# Altium PCB level_shift.PcbDoc
Units mil, origin at the board's own origin, x right, y up, seen from the top; angles counter-clockwise.
Board outline 5680 x 750 mil, 2 copper layers (Top Layer, Bottom Layer); 10 components, 20 nets, 82 pads, 10 vias.
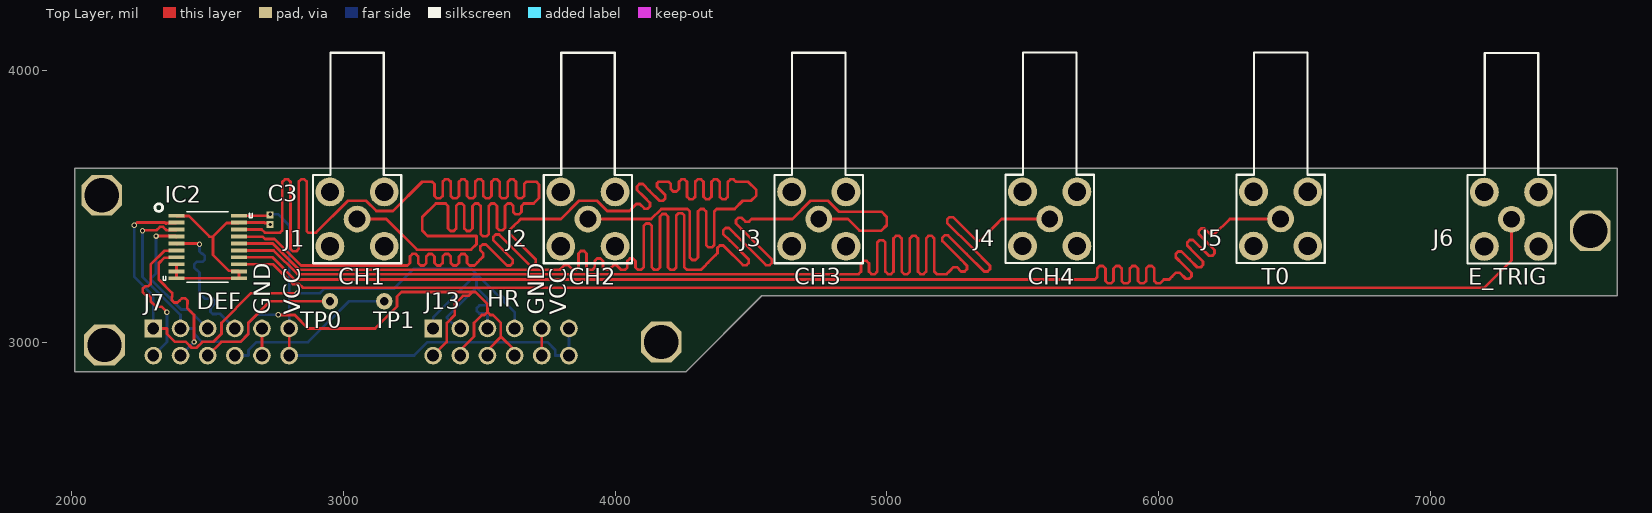
[diagram p0: Top Layer view]
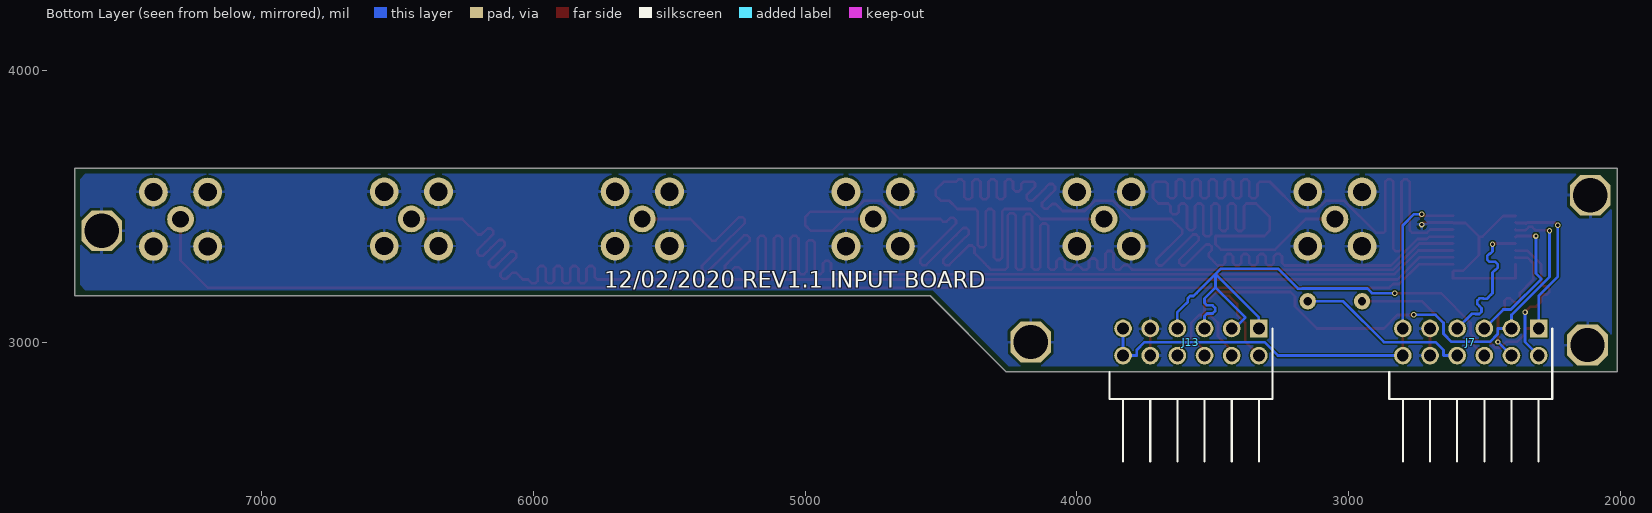
[diagram p1: Bottom Layer view, seen from below]

## Layer stack, top to bottom
Top Solder: solder mask 0.4, Solder Resist, Dk 3.5
Top Layer: signal copper 1.4
Dielectric 1: dielectric 12.6, FR-4, Dk 4.8
Bottom Layer: signal copper 1.4
Bottom Solder: solder mask 0.4, Solder Resist, Dk 3.5

## Board outline
2010,2890 2010,3640 7690,3640 7690,3170 4540,3170 4260,2890

## Design rules (kind name [scope] priority, off if disabled: settings)
BoardOutlineClearance [All] p1: gap=16 ignorepadtopadclearanceinfootprint=FALSE except(0: Arc-SplitContinuation Track-SplitContinuation SMDPad-SplitContinuation THPad-SplitContinuation Via-SplitContinuation Fill-SplitContinuation Poly-SplitContinuation Region-SplitContinuation Text-SplitContinuation)
Clearance [All] p1: gap=6 ignorepadtopadclearanceinfootprint=FALSE except(0: Arc-Hole Track-Hole SMDPad-Hole THPad-Hole Via-Hole Fill-Hole Poly-Hole Region-Hole Text-Hole; 12: Arc-SMDPad Arc-THPad Track-SMDPad Track-THPad SMDPad-SMDPad SMDPad-THPad THPad-THPad)
HoleSize [All] p1: absolutevalues=TRUE maxlimit=245 minlimit=12 maxpercent=80.000 minpercent=20.000
MatchedLengths HR_MATCH [InxSignalClass('IC2->HRPMOD')] p1: tolerance=10 checknetsindiffpair=FALSE checkdiffpairvsdiffpair=TRUE checkxsignals=TRUE checkothers=TRUE
MatchedLengths HR_MATCH1 [InxSignalClass('IC2->HRPMOD1')] p2: tolerance=10 checknetsindiffpair=FALSE checkdiffpairvsdiffpair=TRUE checkxsignals=TRUE checkothers=TRUE
MatchedLengths IC2->SMA [InxSignalClass('IC2->SMA')] p3: tolerance=50 checknetsindiffpair=FALSE checkdiffpairvsdiffpair=TRUE checkxsignals=TRUE checkothers=TRUE
MatchedLengths PMOD->IC2 [InxSignalClass('PMOD->IC2')] p4: tolerance=50 checknetsindiffpair=FALSE checkdiffpairvsdiffpair=TRUE checkxsignals=TRUE checkothers=TRUE
PolygonConnect [All] p1: connectstyle=Relief reliefconductorwidth=10 reliefentries=4 polygonreliefangle="90 Angle" airgapwidth=10
RoutingVias [All] p1: holewidth=245 width=490 viastyle="Through Hole" minholewidth=6 minwidth=12 maxholewidth=23.62 maxwidth=47.24
SignalStimulus IN1 [InNet('NetIC2_13')] p1: kind=2 level=0 starttime=10.00n stoptime=20.00n periodtime=50.00n
SignalStimulus IN6 [InNet('NetIC2_18')] p2: kind=2 level=0 starttime=10.00n stoptime=20.00n periodtime=50.00n
SignalStimulus IN5 [InNet('NetIC2_17')] p3: kind=2 level=0 starttime=10.00n stoptime=20.00n periodtime=50.00n
SignalStimulus IN4 [InNet('NetIC2_16')] p4: kind=2 level=0 starttime=10.00n stoptime=20.00n periodtime=50.00n
SignalStimulus IN3 [InNet('NetIC2_15')] p5: kind=2 level=0 starttime=10.00n stoptime=20.00n periodtime=50.00n
SignalStimulus IN2 [InNet('NetIC2_14')] p6: kind=2 level=0 starttime=10.00n stoptime=20.00n periodtime=50.00n
SolderMaskExpansion [All] p1: expansion=4
SupplyNets GND [InNet('GND')] p1: voltage=0.000
SupplyNets 3v3 [InNet('VCC')] p2: voltage=3.300
Width [All] p1: maxlimit=78.74 minlimit=6 preferedwidth=10 minimp=50.000000 maximp=50.000000 favimp=50.000000
29 further rules are at their usual default settings.

## Components (designator, comment, footprint, x,y, rotation, side; value= is the part's Value field where it differs from the comment)
C3 "100nF" CAPC1005X56N 2730,3450 r90 top
IC2 "SN74LV245APW" SOP65P640X120-20N 2500,3350 r0 top
J1 "CH0" 142-0701-501 3050,3290 r270 top
J2 "CH1" 142-0701-501 3900,3290 r270 top
J3 "CH2" 142-0701-501 4750,3290 r270 top
J4 "CH3" 142-0701-501 5600,3290.4 r270 top
J5 "T0" 142-0701-501 6450,3290.4 r270 top
J6 "E_TRIG" 142-0701-501 7300,3289.4 r270 top
J7 "INPUTS" HDRRA12W64P254_2X6_1524X254X610P 2300,3050 r0 bottom
J13 "HR_INPUTS" HDRRA12W64P254_2X6_1524X254X610P 3330,3050 r0 bottom

## Footprints (in the part's own frame and the unit in brackets; to place one, negate y for a bottom-side part, rotate by r counter-clockwise, add the part's x,y. Pads: shape width x height; smd on the part's side, far side on the other; paste and mask are expansions set on the pad)
142-0701-501 [mm]
  round 2.5 hole 1.57: 1(-4.13,0)
  round 2.7 hole 1.7: 2(-6.67,2.54) 3(-1.59,2.54) 4(-6.67,-2.54) 5(-1.59,-2.54)
  silkscreen extent -19.69,-4.13 0,4.13
CAPC1005X56N [mm]
  rect 0.65x0.64 smd: 1(-0.45,0) 2(0.45,0)
  body extent -0.5,-0.25 0.5,0.25, height 0.56
HDRRA12W64P254_2X6_1524X254X610P [mm]
  rect 1.65x1.65 hole 1.1: 1(0,0)
  round 1.65 hole 1.1: 2(0,2.54) 3(2.54,0) 4(2.54,2.54) 5(5.08,0) 6(5.08,2.54) 7(7.62,0) 8(7.62,2.54) 9(10.16,0) 10(10.16,2.54) 11(12.7,0) 12(12.7,2.54)
  silkscreen extent -1.27,0 13.97,12.44, body extent -1.27,-0.32 13.97,12.44, height 6.1
SOP65P640X120-20N [mil]
  rect 58x14 smd: 1(-115,115) 2(-115,90) 3(-115,64) 4(-115,38) 5(-115,13) 6(-115,-13) 7(-115,-38) 8(-115,-64) 9(-115,-90) 10(-115,-115) 11(115,-115) 12(115,-90) 13(115,-64) 14(115,-38) 15(115,-13) 16(115,13) 17(115,38) 18(115,64) 19(115,90) 20(115,115)
  silkscreen extent -164,-130 164,130

## Part data
C3: library part 0402YC104MAT2A, "Capacitor", Manufacturer_Name=AVX, Mouser Part Number=581-0402YC104MAT2A, Datasheet Link=http://www.mouser.com/catalog/supplier/library/pdf/AVXSurfaceMountCeramic.pdf, Height=0.56mm, Manufacturer_Part_Number=0402YC104MAT2A, Mouser Price/Stock=https://www.mouser.com/Search/Refine.aspx?Keyword=581-0402YC104MAT2A
IC2: "Integrated Circuit", Manufacturer_Name="Texas Instruments", Mouser Part Number=595-SN74LV245APW, RS Part Number=4394371, Datasheet Link=http://www.ti.com/lit/gpn/SN74LV245A, Manufacturer_Part_Number=SN74LV245APW, Mouser Price/Stock=https://www.mouser.com/Search/Refine.aspx?Keyword=595-SN74LV245APW, RS Price/Stock=https://uk.rs-online.com/web/p/products/4394371
J1 J2 J3 J4 J5 J6: library part 142-0701-501, "Connector", Manufacturer_Name=Cinch, RS Part Number=8859850, Datasheet Link=http://uk.rs-online.com/web/p/products/8859850, Manufacturer_Part_Number=142-0701-501, RS Price/Stock=http://uk.rs-online.com/web/p/products/8859850
J7 J13: library part TSW-106-08-L-D-RA, "Connector", Manufacturer_Name=SAMTEC, Mouser Part Number=200-TSW10608LDRA, RS Part Number=7670934P, Datasheet Link=http://suddendocs.samtec.com/catalog_english/tsw_th.pdf, Height=6.1mm, Manufacturer_Part_Number=TSW-106-08-L-D-RA, Mouser Price/Stock=https://www.mouser.com/Search/Refine.aspx?Keyword=200-TSW10608LDRA, RS Price/Stock=http://uk.rs-online.com/web/p/products/7670934P

## Free pads (board coordinates)
  round 60 hole 30: 2(2950,3150) 3(3150,3150)
  oct 150x150 hole 126: 4(2110,3540) 4(2120,2988.81) 4(4170,3000) 4(7590,3410)

## Via types
v1: diameter 20, hole 12, Top Layer to Bottom Layer, 10 vias

## Nets (pads, with @x,y where several pads share a name; then routed paths per layer and width w, separated by ;. In a path a pad name is that pad's centre, name@x,y a point inside that pad or via, vN(x,y) a via of type N, cw(c..) or ccw(c..) an arc to the next point about the centre after c; other vN are vias at no path point)
GND: C3.1 IC2.1 IC2.8 IC2.9 IC2.10 IC2.11 IC2.12 IC2.19 J1.2 J1.3 J1.4 J1.5 J2.2 J2.3 J2.4 J2.5 J3.2 J3.3 J3.4 J3.5 J4.2 J4.3 J4.4 J4.5 J5.2 J5.3 J5.4 J5.5 J6.2 J6.3 J6.4 J6.5 J7.9 J7.10 J13.9 J13.10 pad.4 | length 1094.9
  Top Layer w10: IC2.8 IC2.9 IC2.10 IC2.11 IC2.12 2613,3262 2578.96,3262 2520,3320.96 2520,3388.07 ; IC2.1 2386,3464 2431,3464 2506.93,3388.07 2520,3388.07 ; J7.10 J7.9 ; v1(2730,3432.28) 2724.36,3437.92 2710.36,3437.92 2708.28,3440 IC2.19 2613,3438 2569.93,3438 2520,3388.07 ; J13.10 J13.9
IL0: IC2.2 J7.1 J13.1 J13.3 J13.5 J13.7 | length 3004.6
  Top Layer w10: v1(2230,3430) 2240,3440 2342.63,3440 2346.79,3435.84 2348.96,3438 IC2.2@2383,3438 ; J7.1@2294,3056 J7.1 2350.52,3050 2350.52,3029.5 2379.5,3000.52 2419.78,3000.52 2441.3,2979 2458.7,2979 2480.22,3000.52 2520.5,3000.52 2550.52,3030.54 2550.52,3070.5 2660.02,3180 v1(2830,3180) ; IC2.2@2383,3438 IC2.2 IC2.2@2383,3438
  Bottom Layer w10: v1(2230,3430) 2230,3240 2300,3170 J7.1 ; v1(2830,3180) 2913.53,3180 2930.53,3197 3170,3197 3170,3196.47 3186.47,3196.47 3260,3270 3470,3270 3490,3250 ; J13.1 3330,3090 3490,3250 ; J13.3 3420,3050 3380,3090 3490,3200 ; J13.5@3520,3050 J13.5 3530,3090 3530,3096 3521,3105 3500.07,3105 3491.07,3114 3491.07,3126 3500.07,3135 3521,3135 3530,3144 3530,3150 3530,3160 3490,3200 ; J13.7 3630,3110 3610,3130 3591.92,3148.08 3591.92,3148.28 3591.92,3161.01 3583.43,3169.49 3570.71,3169.49 3570.51,3169.49 3560,3180 3490,3250 ; 3490,3200 3490,3250
IL1: IC2.3 J7.3 J13.2 J13.4 J13.6 J13.8 | length 2739.2
  Top Layer w10: v1(2260,3410) 2262,3412 2300,3412 2312,3412 2315,3415 2324,3424 2336,3424 2345,3415 2348,3412 2370,3412 2383,3412 IC2.3 ; v1(2760,3100) 2760.52,3099.48 2820.5,3099.48 2870,3049.98 3116.44,3049.98 3197,3130.53 3197,3167 3214,3184 3474,3184 ; J13.2 3380,3000 3380,3060 3380.52,3060.52 3380.52,3070.5 3409.5,3099.48 3410,3099.48 3410,3140 3440,3170 3460,3170 3474,3184 ; J13.4 3430,2970 3480.52,3020.52 3480.52,3070.5 3509.5,3099.48 3519.48,3099.48 3530,3110 ; J13.6 J13.6@3530,2968.96 ; J13.6@3530,2970 J13.6@3530,2968.96 ; J13.8 3630,2970 3580.52,3019.48 ; 3474,3184 3486,3184 3530,3140 3530,3110 ; J13.6@3530,2968.96 3580.52,3019.48 ; 3530,3110 3540.52,3099.48 3550.5,3099.48 3579.48,3070.5 3579.48,3020.52 3580.52,3019.48
  Bottom Layer w10: v1(2260,3410) 2260,3240 2400,3100 J7.3 2450.52,3050 2450.52,3029.5 2479.5,3000.52 2620.5,3000.52 2650.52,3030.54 2650.52,3070.5 2680.02,3100 v1(2760,3100)
IL2: IC2.4 J7.5 | length 528
  Top Layer w10: v1(2310,3390) 2381,3390 2384,3387 IC2.4
  Bottom Layer w10: v1(2310,3390) 2310,3252.63 2290,3232.63 2402.63,3120 2430,3120 J7.5
IL3: IC2.5 J7.7 | length 548.5
  Top Layer w10: IC2.5@2387,3361 IC2.5 2467,3363 v1(2470,3360)
  Bottom Layer w10: v1(2470,3360) 2470,3340 2470,3334 2479,3325 2480.72,3325 2489.72,3316 2489.72,3304 2480.72,3295 2470,3295 2459.28,3295 2450.28,3286 2450.28,3274 2459.28,3265 2461,3265 2470,3256 2470,3210 2470,3190 2470,3180 2475.75,3174.25 2490.6,3159.4 2503.33,3159.4 2504.75,3160.81 2517.47,3160.81 2525.96,3152.33 2525.96,3139.6 2518.18,3131.82 2510.4,3124.04 2510.4,3111.31 2518.89,3102.83 2531.62,3102.83 2533.03,3104.24 2545.76,3104.24 2550,3100 J7.7
IL4: IC2.6 J7.2 | length 546.1
  Top Layer w10: v1(2350,3110) 2330,3130 2310,3130 2290,3150 2290,3160 2290,3166 2281,3175 2269.83,3175 2260.83,3184 2260.83,3196 2269.83,3205 2281,3205 2290,3214 2290,3285.07 2340.93,3336 2384,3336 IC2.6
  Bottom Layer w10: J7.2 2350,3000 v1(2350,3110)
IL5: IC2.7 J7.4 | length 558.3
  Top Layer w10: IC2.7 2385,3310 2339.93,3310 2320,3290.07 2320,3230 2369.39,3180.61 2369.39,3167.88 2367.98,3166.47 2367.98,3153.74 2376.46,3145.25 2389.19,3145.25 2396.97,3153.03 2404.75,3160.81 2417.47,3160.81 2425.96,3152.33 2425.96,3139.6 2424.54,3138.18 2424.54,3125.46 2439.39,3110.61 2450,3100 v1(2450,3000) ; J7.4 J7.4@2400,2970
  Bottom Layer w10: J7.4 v1(2450,3000)
NetIC2_13: IC2.13 J6.1 | length 4914
  Top Layer w10: IC2.13 2741.37,3286 2813.37,3214 2836,3214 2850,3200 7200,3200 7300,3300 J6.1
NetIC2_14: IC2.14 J5.1 | length 4907
  Top Layer w10: IC2.14 2738,3312 2820,3230 5760,3230 5766,3230 5775,3239 5775,3271 5784,3280 5796,3280 5805,3271 5805,3230 5805,3225 5814,3216 5826,3216 5835,3225 5835,3230 5835,3271 5844,3280 5856,3280 5865,3271 5865,3230 5865,3225 5874,3216 5886,3216 5895,3225 5895,3230 5895,3271 5904,3280 5916,3280 5925,3271 5925,3230 5925,3225 5934,3216 5946,3216 5955,3225 5955,3230 5955,3271 5964,3280 5976,3280 5985,3271 5985,3230 5985,3225 5994,3216 6006,3216 6015,3225 6020,3230 6040,3230 6050.61,3240.61 6065.46,3255.46 6078.18,3255.46 6100.81,3232.83 6113.54,3232.83 6122.02,3241.31 6122.02,3254.04 6093.03,3283.03 6064.04,3312.02 6064.04,3324.75 6072.53,3333.24 6085.25,3333.24 6114.25,3304.25 6143.24,3275.25 6155.97,3275.25 6164.45,3283.74 6164.45,3296.47 6135.46,3325.46 6106.47,3354.45 6106.47,3367.18 6114.95,3375.66 6127.68,3375.66 6156.67,3346.67 6185.66,3317.68 6198.39,3317.68 6206.88,3326.17 6206.88,3338.89 6177.89,3367.89 6148.89,3396.88 6148.89,3409.61 6157.38,3418.09 6170.11,3418.09 6192.73,3395.46 6205.46,3395.46 6263,3453 6278,3453 6300,3453 J5.1
NetIC2_15: IC2.15 J4.1 | length 4914
  Top Layer w10: IC2.15 2743,3337 2830,3250 4890,3250 4896,3250 4905,3259 4905,3289.85 4914,3298.85 4926,3298.85 4935,3289.85 4935,3259 4944,3250 4956,3250 4965,3259 4965,3365.8 4974,3374.8 4986,3374.8 4995,3365.8 4995,3259 5004,3250 5016,3250 5025,3259 5025,3381.79 5034,3390.79 5046,3390.79 5055,3381.79 5055,3259 5064,3250 5076,3250 5085,3259 5085,3381.79 5094,3390.79 5106,3390.79 5115,3381.79 5115,3259 5124,3250 5136,3250 5145,3259 5145,3381.79 5154,3390.79 5166,3390.79 5175,3381.79 5175,3259 5184,3250 5205,3250 5220,3250 5230.61,3260.61 5245.46,3275.46 5258.18,3275.46 5274.06,3259.58 5286.79,3259.58 5295.27,3268.06 5295.27,3280.79 5273.03,3303.03 5204.58,3371.49 5204.58,3384.22 5213.06,3392.7 5225.79,3392.7 5294.25,3324.25 5358.91,3259.58 5371.64,3259.58 5380.13,3268.06 5380.13,3280.79 5315.46,3345.46 5222.27,3438.65 5222.27,3451.38 5230.75,3459.87 5243.48,3459.87 5330.31,3373.04 5343.04,3373.04 5400,3430 5423,3453 J4.1
NetIC2_16: IC2.16 J3.1 | length 4914
  Top Layer w10: IC2.16 2739.63,3363 2836.63,3266 3790,3266 3796.14,3266 3805,3274.86 3814,3283.86 3826,3283.86 3835,3274.86 3843.86,3266 3856,3266 3865,3275 3865,3326.22 3874,3335.22 3886,3335.22 3895,3326.22 3895,3275 3904,3266 3916,3266 3925,3275 3925,3298.39 3934,3307.39 3946,3307.39 3955,3298.39 3955,3275 3964,3266 3977.55,3266 3985,3273.45 3994,3282.45 4006,3282.45 4015,3273.45 4022.45,3266 4036,3266 4045,3275 4045,3298.39 4054,3307.39 4066,3307.39 4075,3298.39 4075,3275 4084,3266 4096,3266 4105,3275 4105,3427.6 4114,3436.6 4126,3436.6 4135,3427.6 4135,3275 4144,3266 4156,3266 4165,3275 4165,3462.37 4174,3471.37 4186,3471.37 4195,3462.37 4195,3275 4204,3266 4216,3266 4225,3275 4225,3465 4234,3474 4246,3474 4255,3465 4255,3275 4264,3266 4285,3266 4315,3266 4316,3266 4326.61,3276.61 4342.5,3292.5 4370,3320 4377,3327 4377,3334.21 4377,3346.94 4385.48,3355.43 4398.21,3355.43 4401.82,3351.82 4470.83,3282.81 4483.56,3282.81 4492.05,3291.29 4492.05,3304.02 4423.03,3373.03 4397.81,3398.26 4397.81,3410.99 4406.29,3419.47 4419.02,3419.47 4444.25,3394.25 4555.69,3282.81 4568.41,3282.81 4576.9,3291.29 4576.9,3304.02 4465.46,3415.46 4444.94,3435.98 4444.94,3448.71 4453.42,3457.19 4466.15,3457.19 4480.31,3443.04 4493.04,3443.04 4502.6,3452.6 4652.6,3452.6 4720,3520 4783.39,3520 4823.39,3480 4980,3480 5000,3460 5000,3430 4980,3410 4900,3410 4857.4,3452.6 J3.1
NetIC2_17: IC2.17 J2.1 | length 4914.1
  Top Layer w10: IC2.17 2702.22,3388 2711.22,3379 2746.25,3379 2843.25,3282 3230,3282 3236,3282 3245,3291 3245,3315.51 3254,3324.51 3266,3324.51 3275,3315.51 3275,3291 3284,3282 3296,3282 3305,3291 3305,3315 3314,3324 3326,3324 3335,3315 3335,3291 3344,3282 3356,3282 3365,3291 3365,3315 3374,3324 3386,3324 3395,3315 3395,3291 3404,3282 3416,3282 3425,3291 3425,3315 3434,3324 3446,3324 3455,3315 3455,3291 3464,3282 3482,3282 3492.61,3292.61 3505,3305 3510,3310 3514.24,3314.24 3514.24,3326.97 3503.11,3338.1 3503.11,3350.83 3511.6,3359.32 3524.32,3359.32 3541.82,3341.82 3601.64,3282 3614.37,3282 3622.85,3290.48 3622.85,3303.21 3563.03,3363.03 3551.82,3374.25 3551.82,3386.97 3560.31,3395.46 3573.03,3395.46 3584.25,3384.25 3686.49,3282 3699.22,3282 3707.71,3290.48 3707.71,3303.21 3611.82,3399.1 3611.82,3411.82 3626.67,3426.67 3647.89,3447.89 3652.6,3452.6 3667.6,3452.6 3680,3452.6 3800,3452.6 3867.4,3520 3933.39,3520 3970.94,3482.45 4052.45,3482.45 4063.06,3493.06 4077.9,3507.9 4090.63,3507.9 4107.52,3491.02 4120.25,3491.02 4128.73,3499.5 4128.73,3512.23 4105.48,3535.48 4080.8,3560.16 4080.8,3572.89 4089.28,3581.38 4102.01,3581.38 4126.69,3556.7 4163.32,3520.07 4176.05,3520.07 4184.53,3528.56 4184.53,3541.28 4154.27,3571.54 4154.27,3584.27 4160,3590 4175,3590 4196,3590 4205,3581 4205,3563.34 4214,3554.34 4226,3554.34 4235,3563.34 4235,3590 4244,3599 4256,3599 4265,3590 4265,3534.9 4274,3525.9 4286,3525.9 4295,3534.9 4295,3590 4304,3599 4316,3599 4325,3590 4325,3534.9 4334,3525.9 4346,3525.9 4355,3534.9 4355,3590 4364,3599 4376,3599 4385,3590 4385,3534.9 4394,3525.9 4406,3525.9 4415,3534.9 4415,3590 4424,3599 4436,3599 4445,3590 4475,3590 4490,3590 4520,3560 4520,3540 4500,3520 4470,3520 4440,3490 4425,3490 4395,3490 4374,3490 4365,3481 4365,3357.53 4356,3348.53 4344,3348.53 4335,3357.53 4335,3481 4326,3490 4314,3490 4305,3481 4305,3310.9 4296,3301.9 4284,3301.9 4275,3310.9 4275,3481 4266,3490 4180,3490 4170,3490 4132.6,3452.6 J2.1
NetIC2_18: IC2.18 J1.1 | length 4914
  Top Layer w10: IC2.18 2698.85,3414 2710.36,3402.49 2760,3402.49 2766,3402.49 2775,3411.49 2775,3590.01 2784,3599.01 2796,3599.01 2805,3590.01 2805,3402.49 2805,3342.88 2814,3333.88 2826,3333.88 2835,3342.88 2835,3402.49 2835,3590.01 2844,3599.01 2856,3599.01 2865,3590.01 2865,3407.49 2870,3402.49 2899.1,3402.49 3016.61,3520 3083.39,3520 3120.94,3482.45 3182.45,3482.45 3290,3590 3305,3590 3326,3590 3335,3581 3335,3537.8 3344,3528.8 3356,3528.8 3365,3537.8 3365,3590 3374,3599 3386,3599 3395,3590 3395,3537.8 3404,3528.8 3416,3528.8 3425,3537.8 3425,3590 3434,3599 3446,3599 3455,3590 3455,3537.8 3464,3528.8 3476,3528.8 3485,3537.8 3485,3590 3494,3599 3506,3599 3515,3590 3515,3537.8 3524,3528.8 3536,3528.8 3545,3537.8 3545,3590 3554,3599 3566,3599 3575,3590 3575,3537.8 3584,3528.8 3596,3528.8 3605,3537.8 3605,3590 3614,3599 3626,3599 3635,3590 3635,3537.8 3644,3528.8 3656,3528.8 3665,3537.8 3665,3581 3674,3590 3695,3590 3710,3590 3720,3580 3720,3530 3700,3510 3685,3510 3664,3510 3655,3501 3655,3478.98 3646,3469.98 3634,3469.98 3625,3478.98 3625,3501 3616,3510 3604,3510 3595,3501 3595,3420.43 3586,3411.43 3574,3411.43 3565,3420.43 3565,3501 3556,3510 3544,3510 3535,3501 3535,3398.37 3526,3389.37 3514,3389.37 3505,3398.37 3505,3501 3496,3510 3484,3510 3475,3501 3475,3417.8 3466,3408.8 3454,3408.8 3445,3417.8 3445,3501 3436,3510 3424,3510 3415,3501 3415,3417.8 3406,3408.8 3394,3408.8 3385,3417.8 3385,3501 3376,3510 3340,3510 3290,3460 3290,3410 3310,3390 3490,3390 3490,3360 3470,3340 3270,3340 3157.4,3452.6 J1.1
OP0: 
OP1: 
OP2: 
OP3: 
TP0: J7.6 pad.2 | length 576.3
  Top Layer w10: J7.6 2550.52,3000.52 2620.5,3000.52 2649.48,3029.5 2649.48,3069.48 2730,3150 pad.2
  Bottom Layer w10: J7.6 J7.6@2520,2950
TP1: J7.8 pad.3 | length 644.8
  Bottom Layer w10: J7.8 2650.52,2950 2650.52,2970.5 2679.5,2999.48 2869.48,2999.48 3020,3150 pad.3
VCC: C3.2 IC2.20 J7.11 J7.12 J13.11 J13.12 | length 1873.7
  Top Layer w10: IC2.20 2727.28,3465 C3.2 C3.2@2735.64,3462.08 ; J7.12 J7.11
  Bottom Layer w10: v1(2730,3470) 2760,3470 2800,3430 J7.11 ; J7.12 3260.02,2950 3309.5,2999.48 3750.5,2999.48 3779.48,2970.5 3779.48,2950 J13.12 J13.11

## Polygon pours and split planes (outlines as drawn)
GND on Bottom Layer "GND_PLN" (solid, pour order 0): 2030,3600 2050,3620 7650,3620 7670,3600 7670,3210 7650,3190 4530,3190 4250,2910 2050,2910 2030,2930

## Silkscreen, mask and mechanical layers (free items; w line width, h text height)
Top Overlay:
  circle w10: c2320,3495 r14.14
  text "CH1" at 2980,3210 h60
  text "CH2" at 3830,3210 h60
  text "CH3" at 4660,3210 h60
  text "CH4" at 5520,3210 h60
  text "T0" at 6380,3210 h60
  text "E_TRIG" at 7140,3210 h60
  text "HR" at 3530,3130 h60
  text "DEF" at 2460,3120 h60
  text "GND" at 2730,3100 h60 r90
  text "VCC" at 2840,3100 h60 r90
  text "GND" at 3740,3100 h60 r90
  text "VCC" at 3820,3100 h60 r90
  text "TP0" at 2840,3050 h60
  text "TP1" at 3110,3050 h60
Bottom Overlay:
  text "12/02/2020 REV1.1 INPUT BOARD" at 5740,3200 h60
EdgeCuts:
  lines w10: 2010,2890 2010,3640 7690,3640 7690,3170 4540,3170 4260,2890 3110,2890 2010,2890

## Dimensions
2010,3640 to 7690,3640 on dimensions
2010,2890 to 2010,3640 on dimensions